# Altium PCB PCB1.PcbDoc
Units mm, origin at the board's own origin, x right, y up, seen from the top; angles counter-clockwise.
Board outline 116.1 x 105.6 mm, 2 copper layers (Top Layer, Bottom Layer), stack 1 mm thick; 45 components, 42 nets, 195 pads, 3 vias.
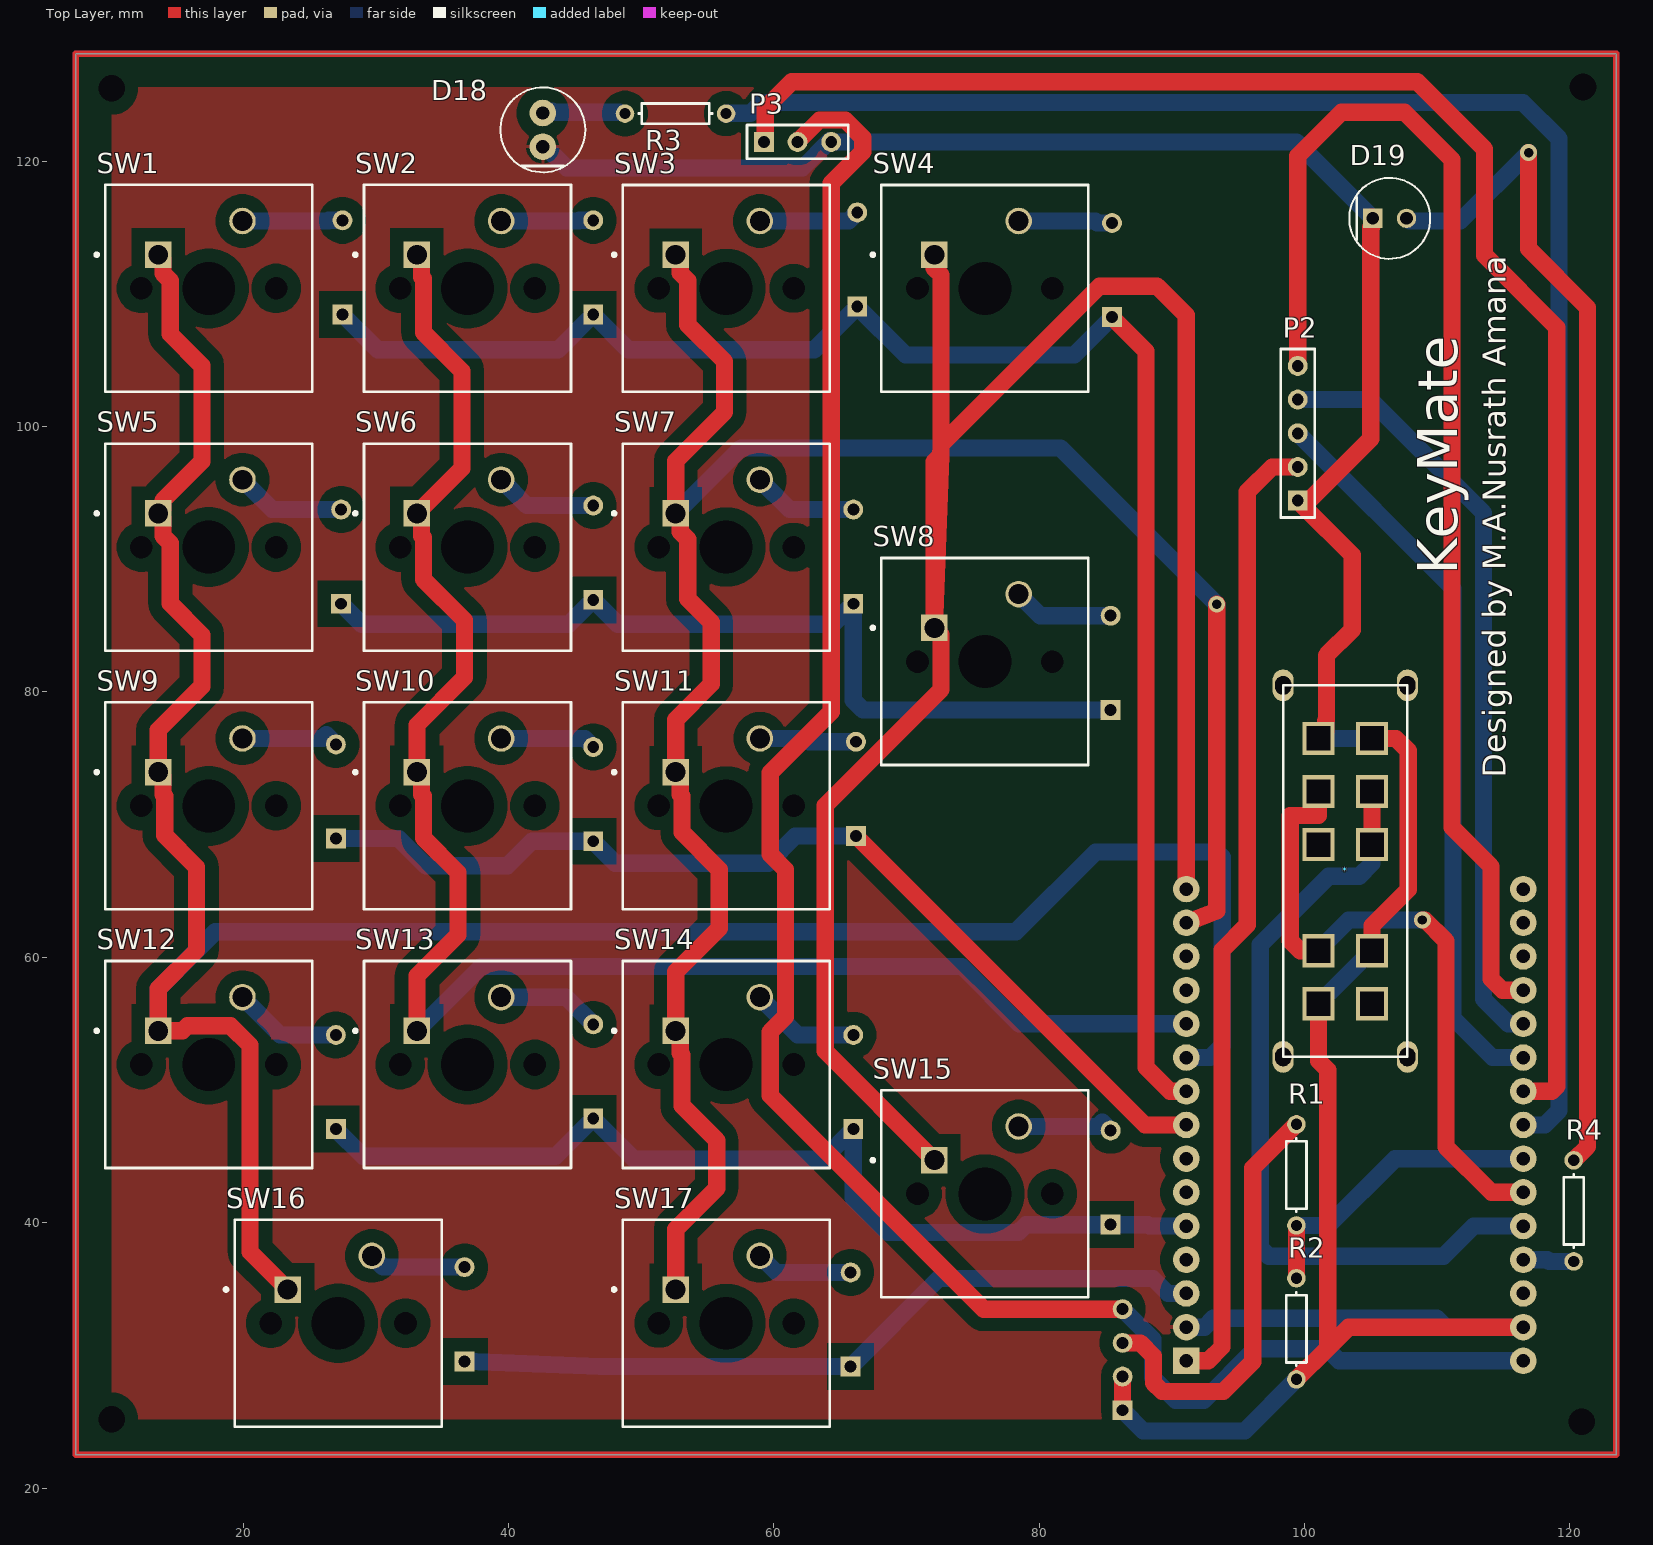
[diagram p0: Top Layer view]
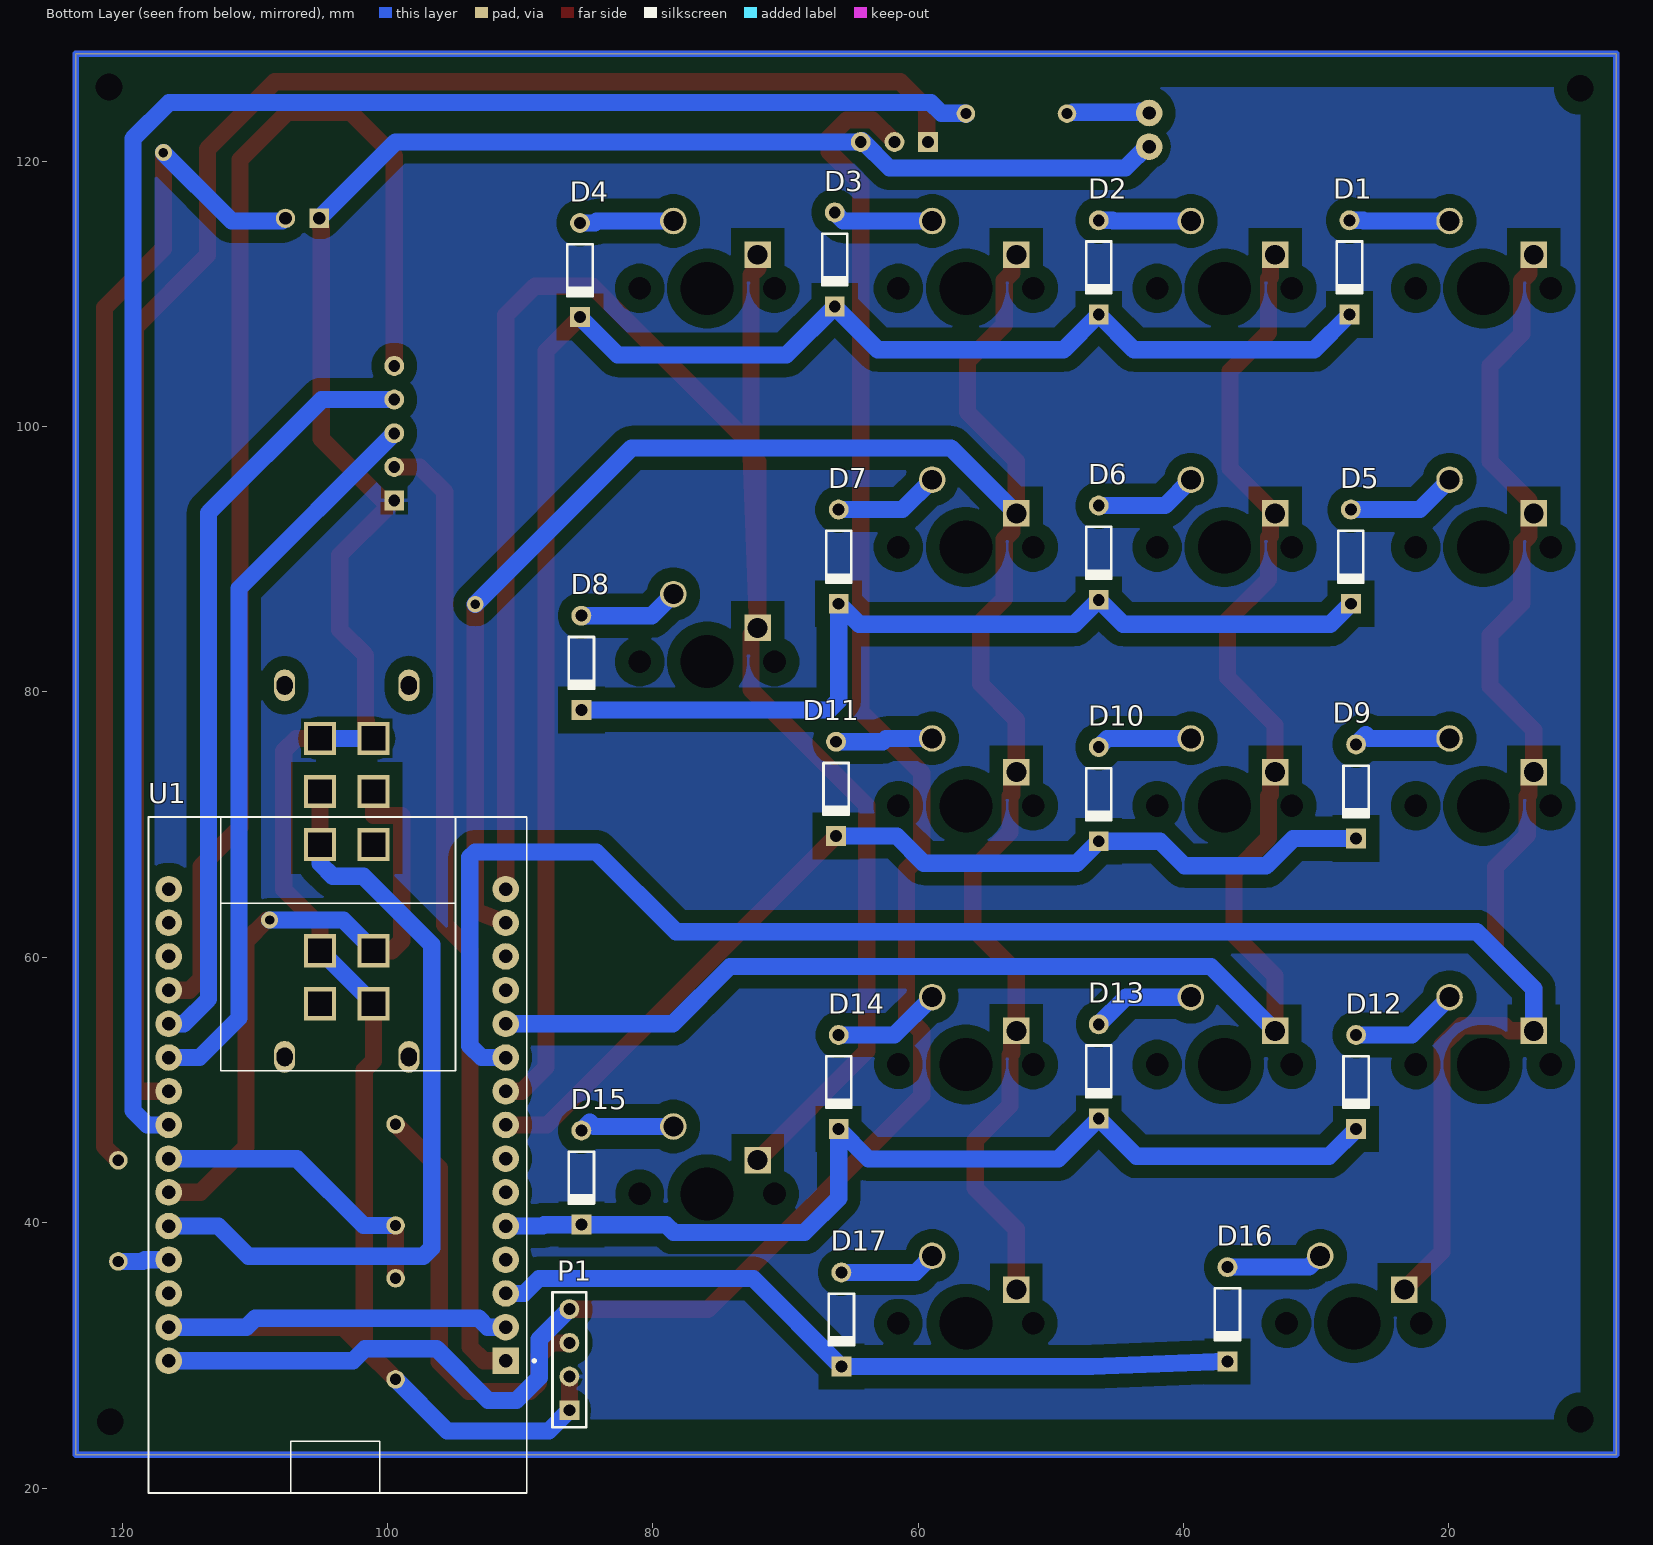
[diagram p1: Bottom Layer view, seen from below]

## Layer stack, top to bottom
Top Solder: solder mask 0.05, Solder Resist, Dk 3.5
Top Layer: signal copper 0.1
Dielectric 1: dielectric 0.8, FR-4, Dk 4.8
Bottom Layer: signal copper 0.1
Bottom Solder: solder mask 0.05, Solder Resist, Dk 3.5

## Board outline
7.4,128.1 7.4,22.5 123.5,22.5 123.5,128.1

## Design rules (kind name [scope] priority, off if disabled: settings)
Clearance Clearance_1 [All] p1: gap=1 ignorepadtopadclearanceinfootprint=FALSE except(0: Arc-Hole Track-Hole SMDPad-Hole THPad-Hole Via-Hole Fill-Hole Poly-Hole Region-Hole Text-Hole; 0.254: Arc-SMDPad Arc-THPad Arc-Via Arc-Text Track-SMDPad Track-THPad Track-Via Track-Text SMDPad-SMDPad SMDPad-THPad SMDPad-Via SMDPad-Text THPad-THPad THPad-Via THPad-Text Via-Via Via-Text Fill-Text Poly-Text Region-Text Text-Text)
Clearance "Schematic Clearance Constraint" [All] p2: gap=0.254 ignorepadtopadclearanceinfootprint=FALSE except(0: Arc-Hole Track-Hole SMDPad-Hole THPad-Hole Via-Hole Fill-Hole Poly-Hole Region-Hole Text-Hole)
Clearance [All] p3: gap=0.25 ignorepadtopadclearanceinfootprint=FALSE except(1: Arc-Fill Arc-Poly Arc-Region Track-Fill Track-Poly Track-Region SMDPad-Fill SMDPad-Poly SMDPad-Region THPad-Fill THPad-Poly THPad-Region Via-Fill Via-Poly Via-Region Fill-Fill Fill-Poly Fill-Region Poly-Poly Poly-Region Region-Region)
PolygonConnect [All] p1: connectstyle=Relief reliefconductorwidth=0.254 reliefentries=4 polygonreliefangle="90 Angle" airgapwidth=0.254
RoutingVias [All] p1: holewidth=0.711 width=1.27 viastyle="Through Hole" minholewidth=0.711 minwidth=1.27 maxholewidth=0.711 maxwidth=1.27
SolderMaskExpansion [All] p1: expansion=0.102 istentingtop=FALSE
Width [All] p1: maxlimit=2 minlimit=0.8 preferedwidth=1.3
30 further rules are at their usual default settings.

## Components (designator, comment, footprint, x,y, rotation, side; value= is the part's Value field where it differs from the comment)
* "slide switch 4 position" SWSLIDT_DP4T_S_20X8 103.08,62.85 r90 top
D1 "Diode 1N4148" DO-35 27.5,112 r270 bottom
D2 "Diode 1N4148" DO-35 46.4,112 r270 bottom
D3 "Diode 1N4148" DO-35 66.3,112.6 r270 bottom
D4 "Diode 1N4148" DO-35 85.5,111.8 r270 bottom
D5 "Diode 1N4148" DO-35 27.4,90.2 r270 bottom
D6 "Diode 1N4148" DO-35 46.4,90.5 r270 bottom
D7 "Diode 1N4148" DO-35 66,90.2 r270 bottom
D8 "Diode 1N4148" DO-35 85.4,82.2 r270 bottom
D9 "Diode 1N4148" DO-35 27,72.5 r270 bottom
D10 "Diode 1N4148" DO-35 46.4,72.3 r270 bottom
D11 "Diode 1N4148" DO-35 66.2,72.7 r270 bottom
D12 "Diode 1N4148" DO-35 27,50.6 r270 bottom
D13 "Diode 1N4148" DO-35 46.4,51.4 r270 bottom
D14 "Diode 1N4148" DO-35 66,50.6 r270 bottom
D15 "Diode 1N4148" DO-35 85.4,43.4 r270 bottom
D16 "Diode 1N4148" DO-35 36.7,33.1 r270 bottom
D17 "Diode 1N4148" DO-35 65.8,32.7 r270 bottom
D18 "IR receiver" FP-SFH_4550-MFG 42.6,122.37 r90 top
D19 "HLMP-4700" FP-HLMP-4700-MFG 106.43,115.7 r0 top
P1 "Header 4" HDR1X4 86.3,25.86 r90 bottom
P2 "Header 5" HDR1X5 99.5,94.42 r90 top
P3 "Header 3" HDR1X3 59.258,121.462 r0 top
R1 "Res1" AXIAL-0.3 99.4,43.6 r90 top value=100K
R2 "Res1" AXIAL-0.3 99.4,32 r90 top value=200K
R3 "Res1" AXIAL-0.3 52.6,123.6 r180 top value=1K
R4 "Res1" AXIAL-0.3 120.3,40.89 r90 top value=1K
SW1 "MX1A-11NW" CHRY-MX1A-11NW_V 17.42,110.42 r0 top
SW2 "MX1A-11NW" CHRY-MX1A-11NW_V 36.92,110.42 r0 top
SW3 "MX1A-11NW" CHRY-MX1A-11NW_V 56.42,110.42 r0 top
SW4 "MX1A-11NW" CHRY-MX1A-11NW_V 75.92,110.42 r0 top
SW5 "MX1A-11NW" CHRY-MX1A-11NW_V 17.42,90.92 r0 top
SW6 "MX1A-11NW" CHRY-MX1A-11NW_V 36.92,90.92 r0 top
SW7 "MX1A-11NW" CHRY-MX1A-11NW_V 56.42,90.92 r0 top
SW8 "MX1A-11NW" CHRY-MX1A-11NW_V 75.92,82.295 r0 top
SW9 "MX1A-11NW" CHRY-MX1A-11NW_V 17.42,71.42 r0 top
SW10 "MX1A-11NW" CHRY-MX1A-11NW_V 36.92,71.42 r0 top
SW11 "MX1A-11NW" CHRY-MX1A-11NW_V 56.42,71.42 r0 top
SW12 "MX1A-11NW" CHRY-MX1A-11NW_V 17.42,51.92 r0 top
SW13 "MX1A-11NW" CHRY-MX1A-11NW_V 36.92,51.92 r0 top
SW14 "MX1A-11NW" CHRY-MX1A-11NW_V 56.42,51.92 r0 top
SW15 "MX1A-11NW" CHRY-MX1A-11NW_V 75.92,42.17 r0 top
SW16 "MX1A-11NW" CHRY-MX1A-11NW_V 27.17,32.42 r0 top
SW17 "MX1A-11NW" CHRY-MX1A-11NW_V 56.42,32.42 r0 top
U1 "ESP32-DEVKIT-V1" MODULE_ESP32_DEVKIT_V1 103.8,45.1 r0 bottom

## Footprints (in the part's own frame and the unit in brackets; to place one, negate y for a bottom-side part, rotate by r counter-clockwise, add the part's x,y. Pads: shape width x height; smd on the part's side, far side on the other; paste and mask are expansions set on the pad)
AXIAL-0.3 [mm] "Axial Device, Thru-Hole; 2 Leads; 0.3 in Pin Spacing"
  round 1.4 hole 0.85: 1(-3.81,0) 2(3.81,0)
  silkscreen extent -2.77,-0.76 2.77,0.76
CHRY-MX1A-11NW_V [mm] "THD, 2-Leads, Body 15.6x15.6mm"
  rect 2x2 hole 1.499 paste+0: 1(-3.81,2.54)
  round 2 hole 1.499 paste+0: 2(2.54,5.08)
  round 0 hole 3.988 unplated paste+0: MH1(0,0)
  round 0 hole 1.702 unplated paste+0: MH2(-5.08,0) MH3(5.08,0)
  silkscreen extent -8.57,-7.8 7.8,7.8, body extent -7.8,-7.8 7.8,7.8, height 15.2
DO-35 [mm] "Diode, Axial; Body 3.8 x 1.9 mm (LxDia. max), Lead Dia. 0.53 mm (max)"
  round 1.5 hole 0.9: 1(-3.55,0)
  rect 1.5x1.5 hole 0.9: 2(3.55,0)
  silkscreen extent -1.95,-0.95 2.05,0.95
FP-HLMP-4700-MFG [mm]
  rect 1.45x1.45 hole 0.95 paste-1000 mask+0: 1(-1.27,0)
  round 1.45 hole 0.95 paste-1000 mask+0: 2(1.27,0)
  silkscreen extent -3.05,-3.05 3.05,3.05, body extent -3.15,-3.15 3.15,3.15, height 0.25
FP-SFH_4550-MFG [mm]
  round 2 hole 1 paste-1000 mask+0: 1(-1.27,0) 2(1.27,0)
  silkscreen extent -3.2,-3.2 3.2,3.2, body extent -3.05,-3.05 3.05,3.05, height 0.25
HDR1X3 [mm] "Connector; Header; 3 Position"
  rect 1.5x1.5 hole 0.9: 1(0,0)
  round 1.5 hole 0.9: 2(2.54,0) 3(5.08,0)
  silkscreen extent -1.27,-1.27 6.35,1.27
HDR1X4 [mm] "Connector; Header; 4 Position"
  rect 1.5x1.5 hole 0.9: 1(0,0)
  round 1.5 hole 0.9: 2(2.54,0) 3(5.08,0) 4(7.62,0)
  silkscreen extent -1.27,-1.27 8.89,1.27
HDR1X5 [mm] "Connector; Header; 5 Position"
  rect 1.5x1.5 hole 0.9: 1(0,0)
  round 1.5 hole 0.9: 2(2.54,0) 3(5.08,0) 4(7.62,0) 5(10.16,0)
  silkscreen extent -1.27,-1.27 11.43,1.27
MODULE_ESP32_DEVKIT_V1 [mm]
  rect 2x2 / inner round 2 / far side rect 2x2 hole 1.02: 1(-12.7,15.515)
  round 2 hole 1.02: 2(-12.7,12.975) 3(-12.7,10.435) 4(-12.7,7.895) 5(-12.7,5.355) 6(-12.7,2.815) 7(-12.7,0.275) 8(-12.7,-2.265) 9(-12.7,-4.805) 10(-12.7,-7.345) 11(-12.7,-9.885) 12(-12.7,-12.425) 13(-12.7,-14.965) 14(-12.7,-17.505) 15(-12.7,-20.045) 16(12.7,-20.045) 17(12.7,-17.505) 18(12.7,-14.965) 19(12.7,-12.425) 20(12.7,-9.885) 21(12.7,-7.345) 22(12.7,-4.805) 23(12.7,-2.265) 24(12.7,0.275) 25(12.7,2.815) 26(12.7,5.355) 27(12.7,7.895) 28(12.7,10.435) 29(12.7,12.975) 30(12.7,15.515)
  round 3 on Bottom Overlay: ""(-12.28,-23.475) ""(-12.28,23.475) ""(12.23,-23.475) ""(12.23,23.475)
  silkscreen extent -14.95,-25.48 14.23,25.47
SWSLIDT_DP4T_S_20X8 [mm]
  rect 2.5x2.4 hole 1.8 square: 1(-6.35,2.02) 2(-2.36,2.02) 4(5.65,2.02) 5(9.65,2.02) 6(13.65,2.02) 7(13.65,-2.02) 8(9.65,-2.02) 9(5.65,-2.02) 11(-2.36,-2.02) 12(-6.35,-2.02)
  oval 2.4x1.6 hole 1.2 slot 1.4 at 0 deg: ""(-10.35,-4.683) ""(-10.35,4.683) ""(17.65,-4.683) ""(17.65,4.683)
  silkscreen extent -10.35,-4.68 17.65,4.68, body extent -10.07,-3.9 10.07,3.9, height 12.25

## Part data
D1 D2 D3 D4 D5 D6 D7 D8 D9 D10 D11 D12 D13 D14 D15 D16 D17: "High Conductance Fast Diode", Code_JEDEC=DO-204-AH, ComponentLink1Description="Manufacturer Link", ComponentLink1URL=http://www.fairchildsemi.com/, ComponentLink2Description=Datasheet, ComponentLink2URL=http://www.fairchildsemi.com/ds/1N%2F1N4148.pdf, DatasheetVersion=1997, LatestRevisionDate=17-Jul-2002, LatestRevisionNote="Re-released for DXP Platform.", PackageDescription="Diode, Axial; Body 3.8 x 1.9 mm (LxDia. max), Lead Dia. 0.53 mm (max)", PackageReference=DO-35, Published=8-Jun-2000, Publisher="Altium Limited"
D18: library part CMP-62016-000011-1, "EMITTER IR 860NM 100MA RADIAL", Colour=Infrared, Forward Current=100mA, Forward Voltage=1.5V, Manufacturer="Osram Opto", Manufacturer Part Number="SFH 4550", Reverse Voltage=5V, Temperature="-40°C to +100°C", Temperature Range High=+100°C, Temperature Range Low=-40°C, Automotive=No, Category=Diode, ComponentLink2Description=Datasheet, ComponentLink2URL=https://dammedia.osram.info/media/resource/hires/osram-dam-5580407/SFH%204550_EN.pdf, Device Class L1=Optoelectronics, Device Class L2=LEDs, Device Class L3=unset, Digikey Description="EMITTER IR 860NM 100MA RADIAL", Lead Free=Yes, Led Orientation=Straight, Mouser Description="Infrared Emitters - High Power Infrared 850 nm HALF ANGLE +/-3DEG", Octopart=https://octopart.com/sfh+4550-osram+opto-55410894, Package="SFH 4550", Peak Emmision Wavelength=860nm, RoHS=TRUE, Viewing Angle=6°
D19: library part CMP-18399-000008-1, "LED RED DIFFUSED T-1 3/4 T/H", Colour=Red, Forward Current=2mA, Forward Voltage=1.7V, Manufacturer=Broadcom, Power Dissipation=14mW, Reverse Voltage=5V, Temperature="-40°C to +100°C", Temperature Range High=+100°C, Temperature Range Low=-40°C, Automotive=No, Category=Diode, ComponentLink2Description=Datasheet, ComponentLink2URL=https://docs.broadcom.com/docs/AV02-1557EN, Device Class L1=Optoelectronics, Device Class L2=LEDs, Device Class L3=unset, Digikey Description="LED RED DIFFUSED T-1 3/4 T/H", Lead Free=Yes, Led Orientation=Straight, Luminous Intensity=2.3mcd, Manufacturer Part Number=HLMP-4700, Mouser Description="LED; Red; 2.3mcd; 0.24In.Dia.; T-1-3/4; 500mA; 1.7V; 635nm; 50deg; 5V; 24mW; -55degC;", Octopart=https://octopart.com/hlmp-4700-broadcom-71130526, Package=HLMP-4700, Peak Emmision Wavelength=635nm, RoHS=TRUE, Viewing Angle=50°, Wavelength=626nm
P1: "Header, 4-Pin", LatestRevisionDate=17-Jul-2002, LatestRevisionNote="Re-released for DXP Platform.", Publisher="Altium Limited"
P2: "Header, 5-Pin", LatestRevisionDate=17-Jul-2002, LatestRevisionNote="Re-released for DXP Platform.", Publisher="Altium Limited"
P3: "Header, 3-Pin", LatestRevisionDate=17-Jul-2002, LatestRevisionNote="Re-released for DXP Platform.", Publisher="Altium Limited"
R1 R2 R3 R4: "Resistor", LatestRevisionDate=17-Jul-2002, LatestRevisionNote="Re-released for DXP Platform.", PackageDescription="Axial Device, Thru-Hole; 2 Leads; 0.3 in Pin Spacing", PackageReference=AXIAL-0.3, Published=8-Jun-2000, Publisher="Altium Limited"
SW1 SW2 SW3 SW4 SW5 SW6 SW7 SW8 SW9 SW10 SW11 SW12 SW13 SW14 SW15 SW16 SW17: library part CMP-2000-06786-1, "Keylock Switch, 12 V, -10 to 70 degC, 2-Pin THD, RoHS, Bulk", Actuator Color=N/A, Illumination Color=N/R, Manufacturer=Cherry, Maximum AC Voltage Rating=12V, Maximum Contact Resistance=200mOhm, Maximum Current Rating=0.01A, Minimum Insulation Resistance=100MOhm, Operating Force=0.58N, Operating Temperature=-10to70C, Package Description="2-Pin Through Hole Device, Body 15.6 x 15.6 mm", Part No=MX1A11NW, Actuator Length=3.6mm, Actuator Material=N/A, Actuator Style=Button, Body Orientation=Straight, Contact Material=Silver/Gold, Contact Plating=N/A, COO=UK, Datasheet URL=https://cdn.sparkfun.com/datasheets/Components/Switches/MX%20Series.pdf, Datasheet Version=09/2000, Dielectric Strength=N/A, Dimension=15.6x15.6x15.2mm, ECCN=EAR99, Electrical Life=50000000Cycle, Family=MX, Housing Material=N/A, HTS=8536509065, Illumination Type=N/R, IP Rating=N/A, Manufacturer URL=http://cherryswitches.com/cn/, Maximum DC Voltage Rating=12V, Maximum Power Rating=N/A, Mechanical Life=N/A, Mounting=ThroughHole, Mounting Technology=ThroughHole, Number of Terminals=2, Operating Speed=N/A, Package Reference=MX1A-11NW, Packaging=N/A, Pole Throw Configuration=SPST, RoHS=Unknown, Row Spacing=6.35mm, Supplier=CherryElectrical, Switch Configuration=N.O., Terminal Pitch=2.54mm, Terminal Type=PCPins, Total Travel=4.06mm, Type=DesktopProfile
U1: "Dual core, Wi-Fi: 2.4 GHz up to 150 Mbits/s,BLE (Bluetooth Low Energy) and legacy Bluetooth, 32 bits, Up to 240 MHz", Package=None, Availability="Not in stock", Check_prices=https://www.snapeda.com/parts/ESP32-DEVKIT-V1/Do+it/view-part/?ref=eda, MF="Do it", MP=ESP32-DEVKIT-V1, Price=None, SnapEDA_Link=https://www.snapeda.com/parts/ESP32-DEVKIT-V1/Do+it/view-part/?ref=snap

## Free pads (board coordinates)
  round 1.524 hole 2: 1(121,125.6) 2(10.1,125.5) 3(10.1,25.2) 4(120.9,25)

## Via types
v1: diameter 1.27, hole 0.711, Top Layer to Bottom Layer, 3 vias

## Nets (pads, with @x,y where several pads share a name; then routed paths per layer and width w, separated by ;. In a path a pad name is that pad's centre, name@x,y a point inside that pad or via, vN(x,y) a via of type N, cw(c..) or ccw(c..) an arc to the next point about the centre after c; other vN are vias at no path point)
3V3: P2.2 U1.1 | length 73
  Top Layer w1.3: U1.1 92.755,29.585 93.796,30.626 93.796,60.545 95.7,62.449 95.7,95.09 97.57,96.96 P2.2
B+: P1.3 R1.2 | length 32.7
  Top Layer w1.3: P1.3 87.63,30.94 88.621,29.949 88.621,27.94 89.281,27.28 93.878,27.28 96.114,29.515 96.114,44.124 R1.2
D4: D12.2 D13.2 D14.2 D15.2 U1.5 | length 74.9
  Bottom Layer w1.3: D12.2 29.05,45 43.55,45 D13.2 49.45,44.8 63.75,44.8 D14.2 66,41.848 68.58,39.268 78.438,39.268 79.019,39.85 D15.2 88.189,39.85 88.294,39.745 U1.5
D5: D9.2 D10.2 D11.2 U1.8 | length 76.3
  Top Layer w1.3: D11.2 87.985,47.365 U1.8
  Bottom Layer w1.3: D9.2 31.736,68.95 33.786,66.9 39.933,66.9 41.783,68.75 D10.2 48.05,67.1 59.582,67.1 61.632,69.15 D11.2
D12: R4.1 U1.27 | length 3.9
  Bottom Layer w1.3: U1.27 118.313,37.205 118.438,37.08 R4.1
D13: U1.28
D14: *.8 *.9 U1.26 | length 60.3
  Top Layer w1.3: *.9 *.8
  Bottom Layer w1.3: *.9 105.1,67.074 104.14,66.114 101.826,66.114 96.672,60.96 96.672,38.1 97.307,37.465 110.49,37.465 112.77,39.745 U1.26
D15: D16.2 D17.2 U1.3 | length 57.6
  Bottom Layer w1.3: D16.2 46.933,29.15 D17.2 72.439,35.789 88.595,35.789 89.719,34.665 U1.3
D17: D5.2 D6.2 D7.2 D8.2 | length 68.4
  Bottom Layer w1.3: D5.2 28.95,85.1 44.55,85.1 D6.2 48.25,85.1 64.45,85.1 D7.2 66,79.375 66.725,78.65 D8.2
D18: D1.2 D2.2 D3.2 D4.2 U1.9 | length 126.7
  Top Layer w1.3: D4.2 88.059,105.691 88.059,51.724 89.877,49.905 U1.9
  Bottom Layer w1.3: D1.2 30.15,105.8 43.75,105.8 D2.2 49.05,105.8 63.05,105.8 D3.2 69.95,105.4 82.65,105.4 D4.2
D19: SW1.1 SW5.1 SW9.1 SW12.1 SW16.1 U1.10 | length 198.7
  Top Layer w1.3: SW1.1 13.96,112.61 13.96,111.567 14.522,111.005 14.522,106.978 16.9,104.6 16.9,97.374 13.96,94.434 13.96,93.81 SW5.1 13.96,93.11 13.96,91.782 14.522,91.22 14.522,86.678 16.9,84.3 16.9,80.421 13.61,77.131 SW9.1 13.96,73.61 13.96,72.282 14.095,72.147 14.095,69.205 16.5,66.8 16.5,60.518 13.61,57.628 SW12.1 15.441,54.46 15.819,54.839 19.05,54.839 20.523,53.365 20.523,37.797 SW16.1
  Bottom Layer w1.3: SW12.1 13.61,57.628 17.907,61.925 78.257,61.925 84.277,67.945 93.4,67.945 93.802,67.543 93.802,53.34 92.907,52.445 U1.10
D21: SW2.1 SW6.1 SW10.1 SW13.1 U1.11 | length 128.6
  Top Layer w1.3: SW13.1 33.11,58.61 36.2,61.7 36.2,66.4 33.595,69.005 33.595,72.147 33.46,72.282 33.46,73.61 SW10.1 33.11,77.51 36.7,81.1 36.7,85.4 33.595,88.505 33.595,91.647 33.46,91.782 33.46,93.11 SW6.1 36.5,96.85 36.5,104.2 33.595,107.105 33.595,111.147 33.46,111.282 33.46,112.61 SW2.1
  Bottom Layer w1.3: SW13.1 37.959,59.309 74.193,59.309 78.517,54.985 U1.11
D22: SW3.1 SW7.1 SW11.1 SW14.1 SW17.1 U1.14 | length 161.9
  Top Layer w1.3: SW17.1 52.61,39.51 55.7,42.6 55.7,46.2 53.095,48.805 53.095,52.647 52.96,52.782 52.96,54.11 SW14.1 52.61,58.909 55.9,62.199 55.9,66.614 53.095,69.419 53.095,72.147 52.96,72.282 52.96,73.61 SW11.1 52.61,77.91 55.3,80.6 55.3,85.258 53.522,87.035 53.522,91.519 52.96,92.081 52.96,93.11 SW7.1 52.61,97.41 56.3,101.1 56.3,104.906 53.522,107.684 53.522,111.019 52.96,111.581 52.96,112.61 SW3.1 ; U1.14 93.4,63.5 v1(93.4,86.61)
  Bottom Layer w1.3: SW7.1 57.55,98.4 81.61,98.4 v1(93.4,86.61)
D23: SW4.1 SW8.1 SW15.1 U1.15 | length 157.3
  Top Layer w1.3: SW15.1 63.881,52.939 63.881,71.45 72.619,80.188 72.619,84.326 SW8.1 ; SW4.1 72.11,111.938 72.619,111.43 72.619,98.654 ; U1.15 91.1,108.392 88.9,110.592 84.557,110.592 72.619,98.654 ; SW8.1 72.11,97.358 72.589,97.837 ; SW8.1 72.589,97.837 ; 72.589,97.837 72.619,97.867 72.619,98.654 ; 72.589,97.837 72.619,98.654
D25: R3.1 U1.23 | length 140.7
  Bottom Layer w1.3: R3.1@56.429,123.554 56.429,123.586 56.456,123.613 58.256,123.613 59.068,124.424 116.476,124.424 119.2,121.7 119.2,48.455 118.11,47.365 U1.23
D26: R1.1 R2.2 U1.24 | length 23.2
  Top Layer w1.3: R2.2 R1.1
  Bottom Layer w1.3: R1.1 101.803,39.79 106.838,44.825 U1.24
D27: *.2 *.5 U1.25 | length 49.8
  Top Layer w1.3: *.2 99.695,60.49 98.933,61.252 98.933,70.688 101.06,70.688 *.5 ; v1(108.9,62.814) 109.093,62.814 110.668,61.239 110.668,45.72 114.103,42.285 U1.25
  Bottom Layer w1.3: *.2 101.06,60.54 103.334,62.814 v1(108.9,62.814)
D32: P2.3 U1.21 | length 55.5
  Bottom Layer w1.3: P2.3 111.2,87.8 111.2,55.427 114.182,52.445 U1.21
D33: P3.1 U1.22 | length 135.3
  Top Layer w1.3: P3.1@59.358,121.462 59.358,123.998 61.36,126 108.5,126 113.586,120.914 113.586,112.914 119.024,107.476 119.024,50.292 118.637,49.905 U1.22
D34: P2.5 U1.19 | length 96
  Top Layer w1.3: P2.5 99.5,120.404 102.796,123.7 107.547,123.7 111.125,120.122 111.125,69.799 114.071,66.853 114.071,58.389 114.935,57.525 U1.19
D35: P2.4 U1.20 | length 58
  Bottom Layer w1.3: P2.4 104.96,102.04 113.5,93.5 113.5,56.852 115.367,54.985 U1.20
GND: *.1 *.6 *.7 *.11 D18.1 D19.1 P1.1 P1.2 P2.1 P3.3 R2.1 U1.2 U1.29 | length 228.4
  Top Layer w1.3: P1.1 P1.2 ; R2.1 101.752,30.542 ; P2.1 100.33,94.42 105,99.09 105,115.009 105.085,115.094 D19.1@105.085,115.775 ; P2.1@99.915,94.005 103.6,90.32 103.6,84.7 101.66,82.76 101.66,77.862 101.61,77.812 101.61,77.05 *.6 ; *.1 101.06,52.197 101.752,51.505 101.752,30.542 ; *.11 105.1,62.382 107.828,65.11 107.828,75.565 106.893,76.5 *.7 ; U1.29 103.335,32.125 101.752,30.542
  Bottom Layer w1.3: D18.1 42.789,121.1 44.389,119.5 62.176,119.5 P3.3@64.238,121.562 ; P3.3 99.398,121.462 D19.1@105.085,115.775 ; P1.1 87.86,24.3 95.51,24.3 R2.1 ; U1.2 92.475,32.125 93.14,32.79 109.983,32.79 110.648,32.125 U1.29 ; *.1 101.067,56.5 105.057,60.49 *.11 ; *.6 *.7
NetD1_1: D1.1 SW1.2 | length 7.6
  Bottom Layer w1.3: SW1.2 26.418,115.5 26.468,115.55 D1.1
NetD2_1: D2.1 SW2.2 | length 7
  Bottom Layer w1.3: SW2.2 45.315,115.5 45.365,115.55 D2.1
NetD3_1: D3.1 SW3.2 | length 7.6
  Bottom Layer w1.3: SW3.2 65.65,115.5 D3.1
NetD4_1: D4.1 SW4.2 | length 7.1
  Bottom Layer w1.3: SW4.2 84.231,115.5 84.381,115.35 D4.1
NetD5_1: D5.1 SW5.2 | length 8.4
  Bottom Layer w1.3: SW5.2 22.21,93.75 D5.1
NetD6_1: D6.1 SW6.2 | length 7.7
  Bottom Layer w1.3: SW6.2 41.41,94.05 D6.1
NetD7_1: D7.1 SW7.2 | length 8
  Bottom Layer w1.3: SW7.2 61.21,93.75 D7.1
NetD8_1: D8.1 SW8.2 | length 7.6
  Bottom Layer w1.3: SW8.2 80.085,85.75 D8.1
NetD9_1: D9.1 SW9.2 | length 7.5
  Bottom Layer w1.3: SW9.2 26.01,76.5 26.28,76.77 D9.1
NetD10_1: D10.1 SW10.2 | length 7.2
  Bottom Layer w1.3: SW10.2 45.75,76.5 D10.1
NetD11_1: D11.1 SW11.2 | length 7.3
  Bottom Layer w1.3: SW11.2 62.433,76.5 62.683,76.25 D11.1
NetD12_1: D12.1 SW12.2 | length 8.2
  Bottom Layer w1.3: SW12.2 22.81,54.15 D12.1
NetD13_1: D13.1 SW13.2 | length 7.8
  Bottom Layer w1.3: SW13.2 44.35,57 D13.1
NetD14_1: D14.1 SW14.2 | length 8.2
  Bottom Layer w1.3: SW14.2 61.81,54.15 D14.1
NetD15_1: D15.1 SW15.2 | length 7.3
  Bottom Layer w1.3: SW15.2 84.43,47.25 84.765,47.585 D15.1
NetD16_1: D16.1 SW16.2 | length 7.3
  Bottom Layer w1.3: SW16.2 30.56,36.65 D16.1
NetD17_1: D17.1 SW17.2 | length 7.4
  Bottom Layer w1.3: SW17.2 60.21,36.25 D17.1
NetD18_2: D18.2 R3.2 | length 5.7
  Bottom Layer w1.3: D18.2@42.6,123.44 D18.2@42.666,123.506 ; D18.2@42.766,123.766 43.329,123.766 43.395,123.7 R3.2@48.359,123.7
NetD19_2: D19.2 R4.2 | length 89.6
  Top Layer w1.3: v1(116.9,120.652) 116.9,113.4 121.336,108.964 121.336,45.736 R4.2
  Bottom Layer w1.3: D19.2@107.729,115.631 107.769,115.671 107.941,115.5 111.748,115.5 v1(116.9,120.652)
VIN: P1.4 P3.2 U1.30 | length 152.1
  Top Layer w1.3: P3.2 63.452,123.116 65.384,123.116 66.712,121.788 66.712,120.712 64.338,118.338 64.338,78.511 59.741,73.914 59.741,67.767 60.884,66.624 60.884,55.524 59.741,54.381 59.741,49.581 75.842,33.48 P1.4
  Bottom Layer w1.3: P1.4 88.57,31.21 88.57,28.33 90.3,26.6 92.418,26.6 96.308,30.49 101.7,30.49 102.605,29.585 U1.30
pads on no net: *. *.4 *.12 SW1.MH1 SW1.MH2 SW1.MH3 SW2.MH1 SW2.MH2 SW2.MH3 SW3.MH1 SW3.MH2 SW3.MH3 SW4.MH1 SW4.MH2 SW4.MH3 SW5.MH1 SW5.MH2 SW5.MH3 SW6.MH1 SW6.MH2 SW6.MH3 SW7.MH1 SW7.MH2 SW7.MH3 SW8.MH1 SW8.MH2 SW8.MH3 SW9.MH1 SW9.MH2 SW9.MH3 SW10.MH1 SW10.MH2 SW10.MH3 SW11.MH1 SW11.MH2 SW11.MH3 SW12.MH1 SW12.MH2 SW12.MH3 SW13.MH1 SW13.MH2 SW13.MH3 SW14.MH1 SW14.MH2 SW14.MH3 SW15.MH1 SW15.MH2 SW15.MH3 SW16.MH1 SW16.MH2 SW16.MH3 SW17.MH1 SW17.MH2 SW17.MH3 U1. U1.4 U1.6 U1.7 U1.12 U1.13 U1.16 U1.17 U1.18
copper on no net: | length 886.8
  Top Layer w0.5: 7.4,22.5 123.5,22.5 123.5,128.1 7.4,128.1 7.4,22.5
  Bottom Layer w0.5: 7.4,22.5 7.4,128.1 123.5,128.1 123.5,22.5 7.4,22.5

## Polygon pours and split planes (outlines as drawn)
GND on Top Layer "GND_L01_P000" (solid, remove dead copper, pour order 0): 10.1,125.5 10.2,125.6 121,125.6 121,25.1 120.9,25 120.7,25.2 10.1,25.2
GND on Bottom Layer "GND_L02_P001" (solid, remove dead copper, pour order 1): 10.1,125.5 10.2,125.6 121,125.6 121,25.1 120.9,25 120.7,25.2 10.1,25.2

## Silkscreen, mask and mechanical layers (free items; w line width, h text height)
Top Overlay:
  text "KeyMate" at 111.538,88.854 h3.02 r90
  text "Designed by M.A.Nusrath Amana" at 115.172,73.554 h1.72 r90